# Altium PCB PCB9.pcbdoc
Units mil, origin at the board's own origin, x right, y up, seen from the top; angles counter-clockwise.
Board outline 1805.78 x 1083.55 mil, 2 copper layers (Top Layer, Bottom Layer); 9 components, 11 nets, 50 pads, 3 vias.
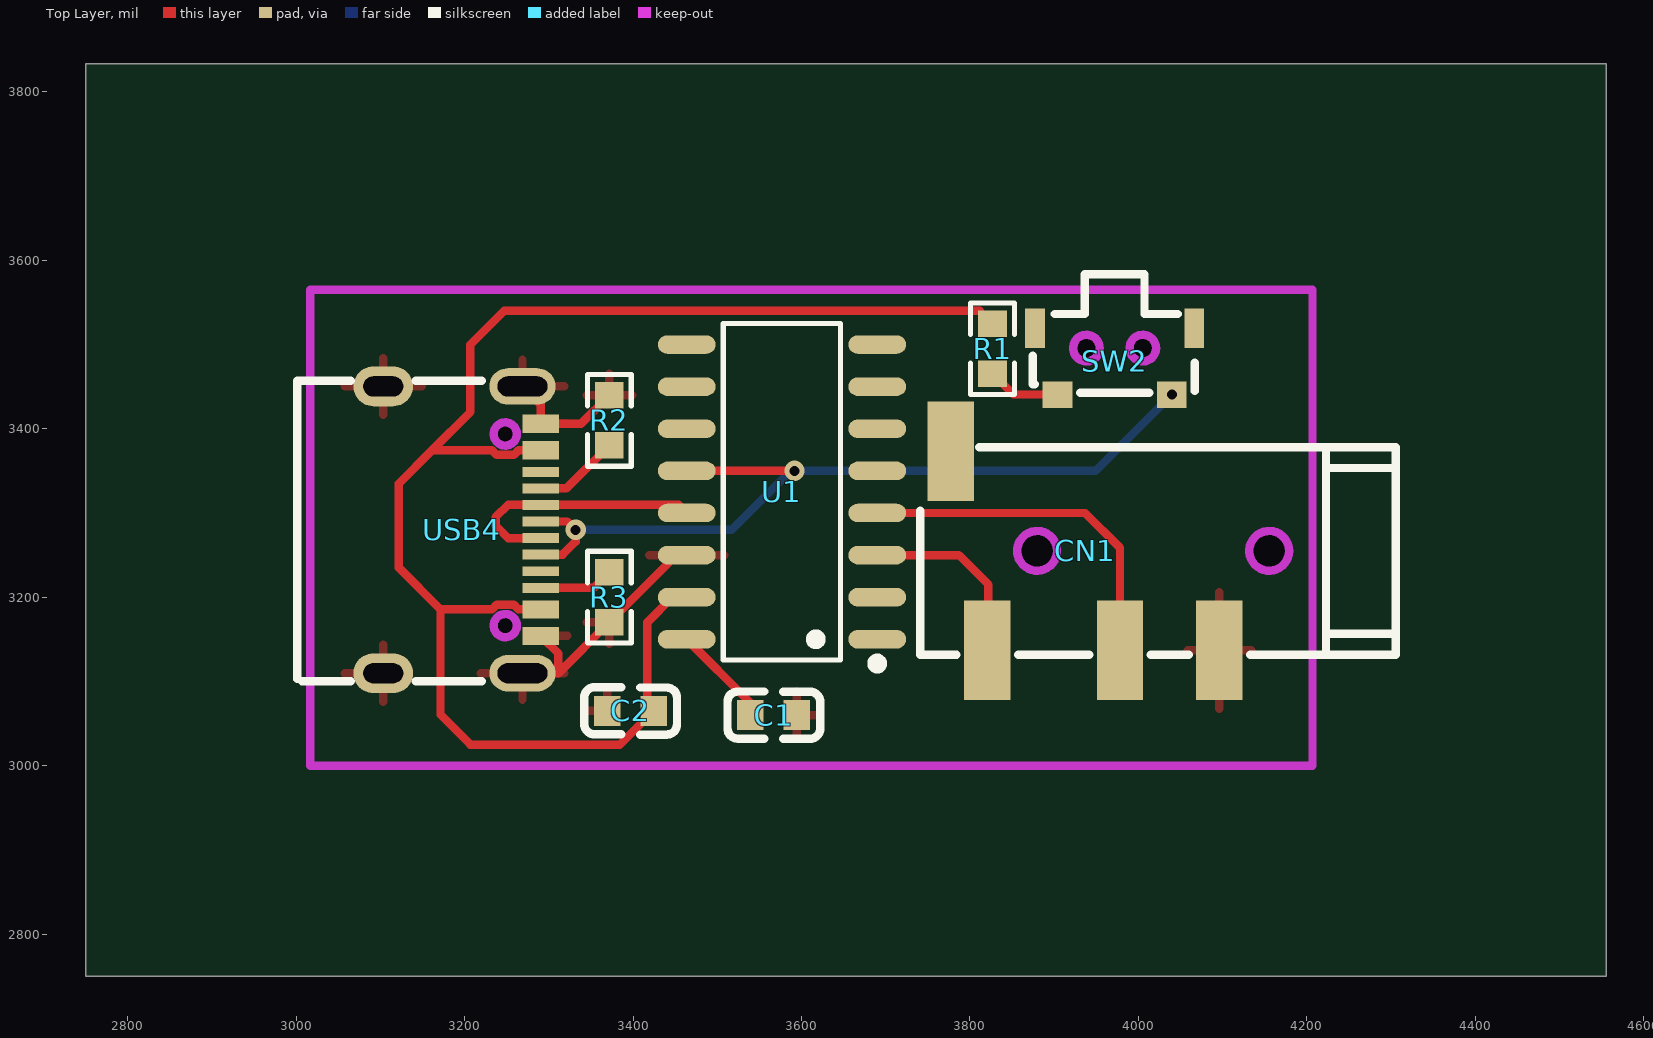
[diagram p0: Top Layer view]
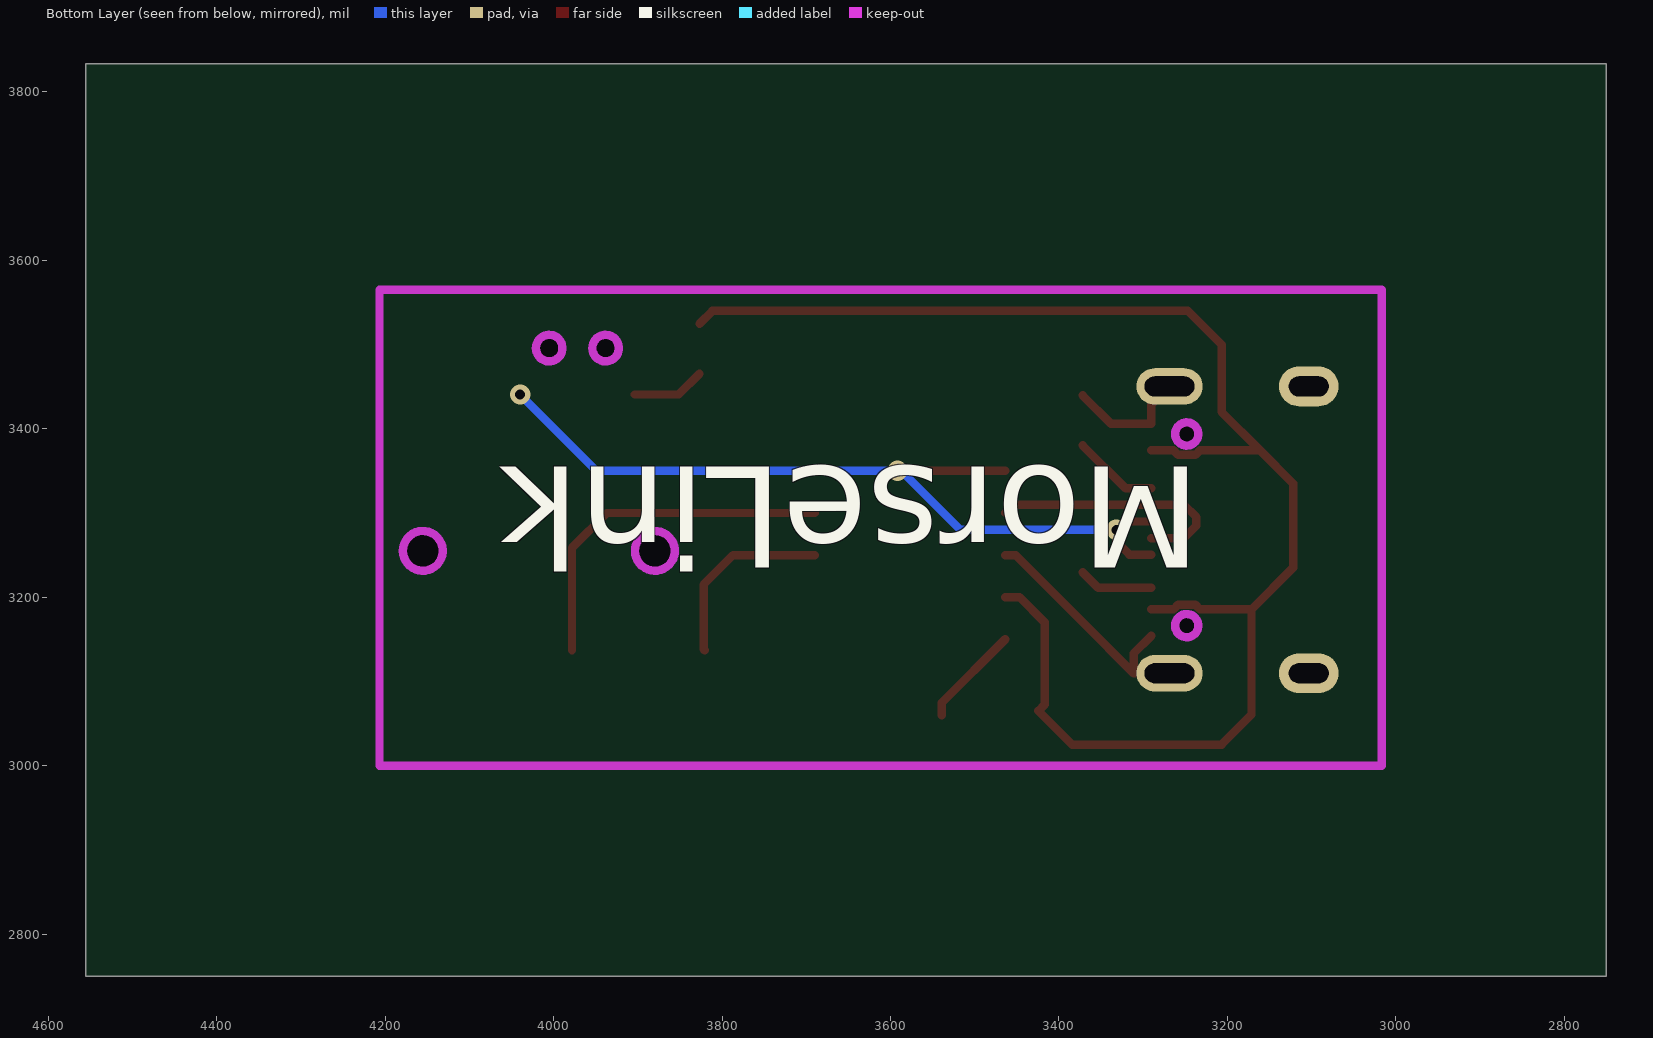
[diagram p1: Bottom Layer view, seen from below]

## Layer stack, top to bottom
Top Layer: signal copper (thickness not stored)
Dielectric: dielectric 12.6, FR-4, Dk 4.8
Bottom Layer: signal copper (thickness not stored)

## Board outline
4555.78,2750 2750,2750 2750,3833.55 4555.78,3833.55

## Design rules (kind name [scope] priority, off if disabled: settings)
Clearance copperThickness1oz [All] p1: gap=7 ignorepadtopadclearanceinfootprint=FALSE except(4: Track-Track; 6: Track-SMDPad SMDPad-SMDPad Track-THPad SMDPad-THPad THPad-THPad Track-Via SMDPad-Via THPad-Via Via-Via SMDPad-Fill THPad-Fill Via-Fill Fill-Fill Track-Region SMDPad-Region THPad-Region Via-Region Region-Region Track-Poly SMDPad-Poly THPad-Poly Via-Poly Fill-Poly Region-Poly Poly-Poly Track-Text SMDPad-Text THPad-Text Via-Text Fill-Text Region-Text Poly-Text Text-Text; 6.9: Track-Hole SMDPad-Hole THPad-Hole Via-Hole Fill-Hole Region-Hole Poly-Hole Text-Hole Sheet-Hole; 11.8: Track-Fill Fill-Region Track-Sheet SMDPad-Sheet THPad-Sheet Via-Sheet Fill-Sheet Region-Sheet Poly-Sheet Text-Sheet)
Clearance copperThickness2oz [All] p1: gap=7 ignorepadtopadclearanceinfootprint=FALSE except(6: Track-SMDPad SMDPad-SMDPad Track-THPad SMDPad-THPad THPad-THPad Track-Via SMDPad-Via THPad-Via Via-Via SMDPad-Fill THPad-Fill Via-Fill Fill-Fill Track-Region SMDPad-Region THPad-Region Via-Region Region-Region Track-Poly SMDPad-Poly THPad-Poly Via-Poly Fill-Poly Region-Poly Poly-Poly Track-Text SMDPad-Text THPad-Text Via-Text Fill-Text Region-Text Poly-Text Text-Text; 6.9: Track-Hole SMDPad-Hole THPad-Hole Via-Hole Fill-Hole Region-Hole Poly-Hole Text-Hole Sheet-Hole; 8: Track-Track; 11.8: Track-Fill Fill-Region Track-Sheet SMDPad-Sheet THPad-Sheet Via-Sheet Fill-Sheet Region-Sheet Poly-Sheet Text-Sheet)
DiffPairsRouting differentialPair [All] p1: maxuncoupledlength=10 maxlimit=6 mostfreqgap=6 toplayer_minwidth=5 toplayer_prefwidth=10 toplayer_maxwidth=100 bottomlayer_minwidth=5 bottomlayer_prefwidth=10 bottomlayer_maxwidth=100
PasteMaskExpansion pasteMaskExpansion [All] p1:
PlaneConnect innerPlane [All] p1: planeconnectstyle=Relief reliefexpansion=20 reliefentries=4 reliefconductorwidth=10 reliefairgap=10
PolygonConnect copperRegion [All] p1: connectstyle=Relief reliefentries=4 reliefconductorwidth=10 polygonreliefangle="90 Angle" airgapwidth=10
RoutingVias viaSize [All] p1: viastyle="Through Hole" holewidth=12.0078 minholewidth=11.811 maxholewidth=248.0314 width=24.0158 minwidth=19.685 maxwidth=393.7008
SolderMaskExpansion solderMaskExpansion [All] p1: useseparateexpansions=TRUE expansion=2 expansionbottom=2
Width copperThickness1oz [All] p1: maxlimit=100 minlimit=5 preferedwidth=10
Width copperThickness2oz [All] p1: maxlimit=100 minlimit=8 preferedwidth=10

## Components (designator, comment, footprint, x,y, rotation, side; value= is the part's Value field where it differs from the comment)
C1 "CC0603KRX7R9BB104" C0603 3566.88,3060 r180 top
C2 "CC0603KRX7R9BB104" C0603 3396.88,3065 r180 top
CN1 "PJ-320D_C431535" AUDIO-SMD_PJ-320D 3936.88,3255 r270 top
R1 "0603WAF2002T5E" R0603 3826.88,3495 r90 top
R2 "ERJ3RBD5101V" R0603 3371.88,3410 r270 top
R3 "ERJ3RBD5101V" R0603 3371.88,3200 r90 top
SW2 "TD-1100SA-250" SW-SMD_TD-1100SA-250 3971.88,3480 r0 top
U1 "CH552G" SOP-16_L10.0-W3.9-P1.27-LS6.0-BL 3576.88,3325 r90 top
USB4 "TYPE-C 16P 贴片四脚插 L=7.35" USB-C-SMD_TYPE-C-6PIN-2MD-073 3196.88,3280 r270 top

## Footprints (in the part's own frame and the unit in brackets; to place one, negate y for a bottom-side part, rotate by r counter-clockwise, add the part's x,y. Pads: shape width x height; smd on the part's side, far side on the other; paste and mask are expansions set on the pad)
AUDIO-SMD_PJ-320D [mm]
  rect 3x1.4 smd: 1(-3,-4.05) 2(3,4.05) 3(3,1.05) 4(3,-2.95)
  Multi-Layer board cut-out: 0,-0.85 -0.26,-0.91 -0.469,-1.076 -0.585,-1.317 -0.585,-1.584 -0.469,-1.824 -0.26,-1.991 0,-2.05 0,-2.05 0.26,-1.991 0.469,-1.824 0.585,-1.584 0.585,-1.317 0.469,-1.076 0.26,-0.91 0,-0.85
  Multi-Layer board cut-out: 0,6.15 -0.26,6.09 -0.469,5.924 -0.585,5.683 -0.585,5.416 -0.469,5.176 -0.26,5.009 0,4.95 0,4.95 0.26,5.009 0.469,5.176 0.585,5.416 0.585,5.683 0.469,5.924 0.26,6.09 0,6.15
  Multi-Layer keep-out circle w0.254: c0,-1.45 r0.6
  Multi-Layer keep-out circle w0.254: c0,5.55 r0.6
  silkscreen extent -3.12,-4.98 3.13,9.37
C0603 [mm]
  rect 0.8x0.9 smd: 1(-0.7,0) 2(0.7,0)
  silkscreen extent -1.41,-0.71 1.39,0.72
R0603 [mil]
  rect 31.75x34.02 smd: 1(-29.66,0) 2(29.66,0)
  silkscreen extent -55,-26 55,26
SOP-16_L10.0-W3.9-P1.27-LS6.0-BL [mm]
  oval 0.56x1.745 smd: 1(-4.445,-2.872) 2(-3.175,-2.872) 3(-1.905,-2.872) 4(-0.635,-2.872) 5(0.635,-2.872) 6(1.905,-2.872) 7(3.175,-2.872) 8(4.445,-2.872) 9(4.445,2.872) 10(3.175,2.872) 11(1.905,2.872) 12(0.635,2.872) 13(-0.635,2.872) 14(-1.905,2.872) 15(-3.175,2.872) 16(-4.445,2.872)
  silkscreen extent -5.33,-3.02 5.08,1.77
SW-SMD_TD-1100SA-250 [mm]
  rect 0.9x0.8 smd: 1(-1.725,-1) 2(1.725,-1)
  rect 0.6x1.2 smd: 3(-2.4,1) 4(2.4,1)
  Multi-Layer board cut-out: -0.45,0.4 -0.506,0.597 -0.652,0.741 -0.85,0.794 -1.048,0.741 -1.194,0.597 -1.25,0.4 -1.25,0.4 -1.194,0.203 -1.048,0.059 -0.85,0.006 -0.652,0.059 -0.506,0.203 -0.45,0.4
  Multi-Layer board cut-out: 1.25,0.4 1.194,0.597 1.048,0.741 0.85,0.794 0.652,0.741 0.506,0.597 0.45,0.4 0.45,0.4 0.506,0.203 0.652,0.059 0.85,0.006 1.048,0.059 1.194,0.203 1.25,0.4
  Multi-Layer keep-out circle w0.254: c-0.85,0.4 r0.4
  Multi-Layer keep-out circle w0.254: c0.85,0.4 r0.4
  silkscreen extent -2.47,-0.94 2.42,2.63
USB-C-SMD_TYPE-C-6PIN-2MD-073 [mm]
  rect 0.55x1.1 smd: 1(-3.2,2.375) 2(-2.4,2.375) 11(2.4,2.375) 12(3.2,2.375)
  rect 0.3x1.1 smd: 3(-1.75,2.375) 4(-1.25,2.375) 5(-0.75,2.375) 6(-0.25,2.375) 7(0.25,2.375) 8(0.75,2.375) 9(1.25,2.375) 10(1.75,2.375)
  oval 1.1x2 hole 0.6 slot 1.5 at 90 deg: 13(-4.325,1.825) 14(4.325,1.825)
  oval 1.2x1.8 hole 0.6 slot 1.2 at 90 deg: 13(-4.325,-2.375) 14(4.325,-2.375)
  Multi-Layer board cut-out: -2.89,1.655 -3.064,1.607 -3.191,1.479 -3.237,1.305 -3.191,1.131 -3.064,1.003 -2.89,0.955 -2.89,0.955 -2.716,1.003 -2.589,1.131 -2.543,1.305 -2.589,1.479 -2.716,1.607 -2.89,1.655
  Multi-Layer board cut-out: 2.89,1.655 2.716,1.607 2.589,1.479 2.543,1.305 2.589,1.131 2.716,1.003 2.89,0.955 2.89,0.955 3.064,1.003 3.191,1.131 3.237,1.305 3.191,1.479 3.064,1.607 2.89,1.655
  Multi-Layer keep-out circle w0.254: c-2.89,1.305 r0.35
  Multi-Layer keep-out circle w0.254: c2.89,1.305 r0.35
  silkscreen extent -4.5,-4.97 4.57,0.6

## Via types
v1: diameter 24.02, hole 12.01, Top Layer to Bottom Layer, 3 vias

## Nets (pads, with @x,y where several pads share a name; then routed paths per layer and width w, separated by ;. In a path a pad name is that pad's centre, name@x,y a point inside that pad or via, vN(x,y) a via of type N, cw(c..) or ccw(c..) an arc to the next point about the centre after c; other vN are vias at no path point)
$1N568: R1.1 SW2.1 | length 87.3
  Top Layer w10: R1.1 3851.59,3440.63 SW2.1
$1N574: C1.2 U1.16 | length 121.3
  Top Layer w10: U1.16 3539.32,3074.47 C1.2
CC1: R2.2 USB4.4 | length 102.7
  Top Layer w10: USB4.4 3320.75,3329.2 R2.2
CC2: R3.2 USB4.10 | length 89.2
  Top Layer w10: USB4.10 3353.32,3211.09 R3.2
DN: U1.13 USB4.5 USB4.7 | length 306.9
  Top Layer w10: USB4.7 3251.73,3270.16 3236.88,3285 3236.88,3295 3251.88,3310 3289.91,3310 USB4.5 3454.27,3309.53 U1.13
DP: 
GND: C1.1 C2.2 CN1.2 R2.1 R3.1 U1.14 USB4.1 USB4.12 USB4.13 USB4.14 | length 454.8
  Top Layer w10: USB4.14@3268.74,3109.72 3311.27,3109.72 ; USB4.13@3268.74,3450.28 3290.39,3428.62 USB4.1 3338.21,3405.99 R2.1 ; USB4.12 3311.27,3133.14 3311.27,3109.72 ; U1.14 3451.54,3250 R3.1 3311.27,3109.72
SW1: CN1.4 U1.3 | length 225
  Top Layer w10: U1.3 3786.88,3250 3821.88,3215 3821.88,3138.03 CN1.4
SW2: CN1.3 U1.4 | length 427.1
  Top Layer w10: U1.4 3936.88,3300 3978.22,3258.66 CN1.3
SW3: U1.2
VCC: C2.1 R1.2 U1.15 USB4.2 USB4.11 | length 1847
  Top Layer w10: USB4.11 3263.99,3185.51 3258.52,3190.98 3238,3190.98 3232.53,3185.51 3171.38,3185.51 ; USB4.2 3263.99,3374.49 3258.52,3369.01 3238,3369.01 3232.53,3374.49 3161.37,3374.49 ; U1.15 3446.88,3200 3416.88,3170 3416.88,3072.56 C2.1 3384.44,3025 3206.88,3025 3171.38,3060.51 3171.38,3185.51 ; R1.2 3811.54,3540 3246.88,3540 3206.88,3500 3206.88,3420 3161.37,3374.49 ; 3161.37,3374.49 3121.88,3335 3121.88,3235 3171.38,3185.51
pads on no net: CN1.1 SW2.2 SW2.3 SW2.4 U1.1 U1.5 U1.6 U1.7 U1.8 U1.9 U1.10 U1.11 U1.12 USB4.3 USB4.6 USB4.8 USB4.9
copper on no net: | length 1010
  Top Layer w10: 3290.39,3250.47 3316.37,3250.47 3331.88,3265.98 v1(3331.88,3280) 3322.04,3289.84 3290.39,3289.84 ; 3463.79,3350 v1(3591.88,3350)
  Bottom Layer w10: v1(3331.88,3280) 3516.88,3280 3586.88,3350 v1(3591.88,3350) 3949.16,3350 v1(4039.79,3440.63)

## Polygon pours and split planes (outlines as drawn)
GND on Top Layer (solid, remove dead copper): 3016.88,3000 4206.88,3000 4206.88,3565 3016.88,3565

## Keep-outs
Board Outline Layer:
  lines w10: 3016.88,3000 4206.88,3000 4206.88,3565 3016.88,3565 3016.88,3000

## Silkscreen, mask and mechanical layers (free items; w line width, h text height)
Bottom Silkscreen Layer:
  text "MorseLink" at 3231.88,3355 h120 r180